# Altium PCB Pico_Stringer_PCB.PcbDoc
Units mm, origin at the board's own origin, x right, y up, seen from the top; angles counter-clockwise.
Board outline 187.9 x 69.4 mm, 2 copper layers (Top Layer, Bottom Layer); 43 components, 42 nets, 172 pads, 24 vias.
Unrouted connection lines stored in the file: 3.
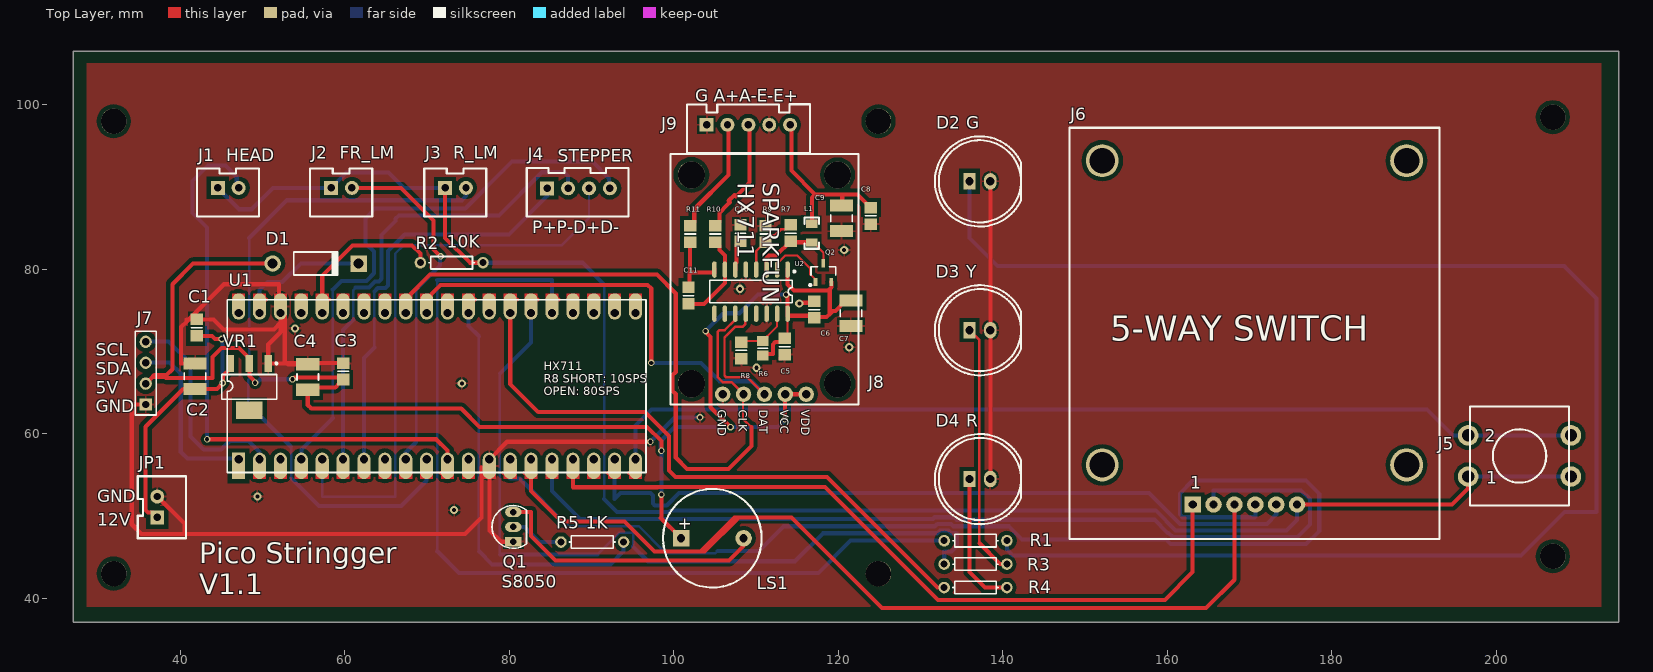
[diagram p0: Top Layer view]
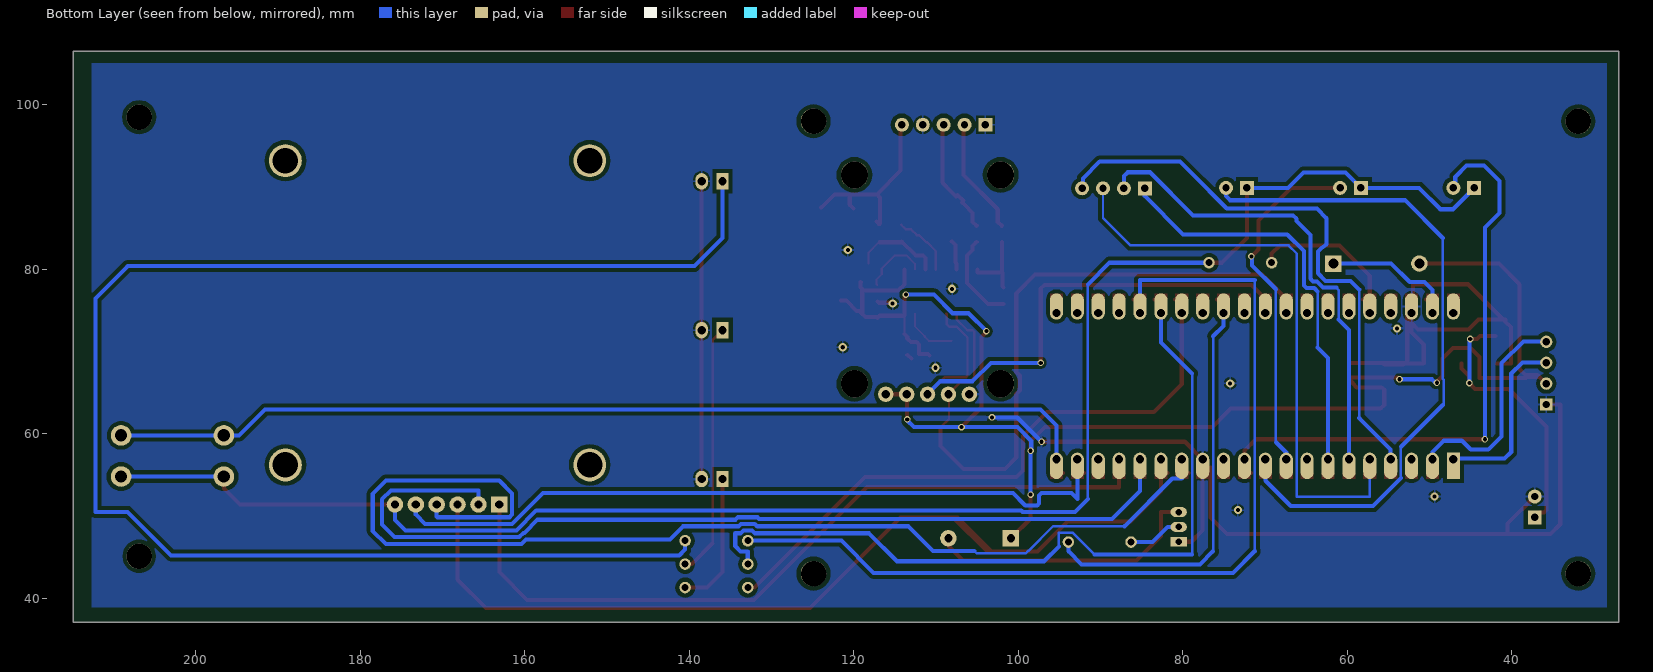
[diagram p1: Bottom Layer view, seen from below]

## Layer stack, top to bottom
Top Solder: solder mask 0.0102, Solder Resist, Dk 3.5
Top Layer: signal copper 0.0356
Dielectric 1: dielectric 0.32, FR-4, Dk 4.8
Bottom Layer: signal copper 0.0356
Bottom Solder: solder mask 0.0102, Solder Resist, Dk 3.5

## Board outline
27,37.1 27,106.5 214.9,106.5 214.9,37.1

## Design rules (kind name [scope] priority, off if disabled: settings)
Clearance [All] p1: gap=0.3 ignorepadtopadclearanceinfootprint=FALSE except(0.5: Arc-Fill Arc-Poly Arc-Region Track-Fill Track-Poly Track-Region SMDPad-Fill SMDPad-Poly SMDPad-Region THPad-Fill THPad-Poly THPad-Region)
PolygonConnect [All] p1: connectstyle=Relief reliefconductorwidth=0.254 reliefentries=4 polygonreliefangle="90 Angle" airgapwidth=0.254
RoutingTopology [All] p1: topology=Daisy_Simple
RoutingVias [All] p1: holewidth=0.5 width=0.8 viastyle="Through Hole" minholewidth=0.5 minwidth=0.8 maxholewidth=0.5 maxwidth=0.8
SMDNeckDown [All] p1: percent=50.000
SolderMaskExpansion [All] p1: expansion=0.102
Width [All] p1: maxlimit=1 minlimit=0.25 preferedwidth=0.3 minimp=50.000000 maximp=50.000000 favimp=50.000000
29 further rules are at their usual default settings.

## Components (designator, comment, footprint, x,y, rotation, side; value= is the part's Value field where it differs from the comment)
C1 "104" 6-0805_M 42,72.9 r270 top
C2 "10uF" C1210_M 41.8,67 r270 top
C3 "104" 6-0805_M 59.8,67.6 r270 top
C4 "10uF" C1210_M 55.5,66.9 r270 top
C5 "104" 6-0805_M 113.5,70.6 r90 top
C6 "104" 6-0805_M 117.1,75.1 r270 top
C7 "10uF" C1210_M 121.55,74.65 r90 top
C8 "104" 6-0805_M 123.975,86.5 r90 top
C9 "10uF" C1210_M 120.4,86.2 r90 top
C10 "104" 6-0805_M 108.114,84.4 r90 top
C11 "104" 6-0805_M 101.8,76.8 r270 top
D1 "IN5819" DO-41 56.46,80.7 r0 top
D2 "LED_G" "10mm LED" 135.96,90.7 r0 top
D3 "LED_Y" "10mm LED" 135.96,72.6 r0 top
D4 "LED_R" "10mm LED" 135.96,54.5 r0 top
J1 "Botton head" XH2.54-LI-2P 45.83,89.9 r0 top
J2 "Front Limit" XH2.54-LI-2P 59.605,89.9 r0 top
J3 "Rear Limit" XH2.54-LI-2P 73.47,89.9 r0 top
J4 "STEPPER" XH2.54-LI-4P 88.43,89.849 r0 top
J5 "Exit Botton" "12x12mm SWITCH" 196.6,54.8 r0 top
J6 "5-way switch" 5WAY_SWITCH 148.114,47.209 r0 top
J7 "2004 LCD" HDR1X4 35.8,63.56 r90 top
J8 "HX711" SPARKFUN_HX711 99.605,94.015 r270 top
J9 "HDR-1X5" XH2.54-LI-5P 109.075,97.575 r0 top
JP1 "HDR-1X2" XH2.54-LI-2P 37.2,51.1 r90 top
L1 "10uH" "L 0805" 116.8,84.4 r270 top
LS1 "Buzzer" Buzzer 104.7,47.3 r0 top
Q1 "SS8050" TO92A 80.5,48.673 r0 top
Q2 "MMBT4403" SOT23-3L 118.2,79.6 r0 top
R1 "150" AXIAL-0.3 136.7,47 r0 top
R2 "10K" AXIAL-0.3 73,80.8 r0 top
R3 "150" AXIAL-0.3 136.7,44.15 r0 top
R4 "150" AXIAL-0.3 136.7,41.3 r0 top
R5 "1K" AXIAL-0.3 90.1,46.835 r180 top
R6 "10K" 6-0805_N 110.8,70.4 r270 top
R7 "20K" 6-0805_M 114.227,84.4 r270 top
R8 "0K" 6-0805_M 108.225,70.15 r90 top
R9 "8.2K" 6-0805_M 111.17,84.3 r270 top
R10 "100" 6-0805_M 105.057,84.3 r270 top
R11 "100" 6-0805_M 102,84.3 r270 top
U1 "Pi Pico" PICO 45.6,52.35 r90 top
U2 "HX711" SOP16 109.4,77.3 r270 top
VR1 "AMS1117-5.0" AMS1117 61.6,72.5 r180 top

## Footprints (in the part's own frame and the unit in brackets; to place one, negate y for a bottom-side part, rotate by r counter-clockwise, add the part's x,y. Pads: shape width x height; smd on the part's side, far side on the other; paste and mask are expansions set on the pad)
5WAY_SWITCH [mm]
  rect 2x2 hole 1: 1(14.986,4.191)
  round 2 hole 1: 2(17.526,4.191) 3(20.066,4.191) 4(22.606,4.191) 5(25.146,4.191) 6(27.686,4.191)
  round 4 hole 3.1 unplated: ¢¯(4,9) ¢¯(4,46) ¢¯(41,9) ¢¯(41,46)
  silkscreen extent 0,0 45,50
6-0805_M [mm] "Chip Resistor, Body 2.0x1.2mm, IPC Low Density"
  rect 1.4x1.5 smd: 1(-1,0) 2(1,0)
  silkscreen extent 0,-0.65 0,0.65, body extent -1.07,-0.7 1.07,0.7, height 0.7
6-0805_N [mm] "Chip Resistor, Body 2.0x1.2mm, IPC Medium Density"
  rect 1.2x1.4 smd: 1(-0.9,0) 2(0.9,0)
  silkscreen extent 0,-0.6 0,0.6, body extent -1.07,-0.7 1.07,0.7, height 0.7
"10mm LED" [mm]
  rect 1.5x2 hole 1: 1(0,0)
  oval 1.5x2 hole 1: 2(2.54,0)
  silkscreen extent -4.2,-5.5 6.27,5.47
"12x12mm SWITCH" [mm]
  round 2.5 hole 1.5: 1(0,0) 1(12.5,0) 2(0,5) 2(12.5,5)
  silkscreen extent 0.25,-3.5 12.25,8.5
AMS1117 [mm]
  rect 0.9x2.1 smd: 1(15.5,3.95) 2(10.9,3.95) 3(13.2,3.95)
  rect 3.2x2.1 smd: 4(13.2,9.65)
  silkscreen extent 9.77,3.83 16.55,8.3, body extent 9.85,4.95 16.55,8.65, height 1.7
AXIAL-0.3 [mm] "Axial Device, Thru-Hole; 2 Leads; 0.3 in Pin Spacing"
  round 1.4 hole 0.85: 1(-3.81,0) 2(3.81,0)
  silkscreen extent -2.77,-0.76 2.77,0.76
Buzzer [mm]
  rect 2x2 hole 1: 1(-3.8,0)
  round 2 hole 1: 2(3.8,0)
  silkscreen extent -6,-6 6,6
C1210_M [mm] "Chip Capacitor, Body 3.2x2.5mm, IPC Low Density"
  rect 1.5x2.8 smd: 1(-1.55,0) 2(1.55,0)
  silkscreen extent -0.4,-1.3 0.4,1.3, body extent -1.7,-1.35 1.7,1.35, height 1.5
DO-41 [mm] "Diode, Axial; Body 5.2 x 2.7 mm (LxDia. max), Lead Dia. 0.86 mm (max)"
  round 2 hole 1.2: 1(-5.23,0)
  rect 2x2 hole 1.2: 2(5.23,0)
  silkscreen extent -2.65,-1.4 2.75,1.4
HDR1X4 [mm] "Connector; Header; 4 Position"
  rect 1.5x1.5 hole 0.9: 1(0,0)
  round 1.5 hole 0.9: 2(2.54,0) 3(5.08,0) 4(7.62,0)
  silkscreen extent -1.27,-1.27 8.89,1.27
"L 0805" [mil] "小功率贴片电感        淘宝ID:黄晶宝石"
  rect 40x55 smd: 1(-45,0) 2(45,0)
  silkscreen extent -75,-35 75,35, body extent -39,-24 39,24, height 35
PICO [mm]
  rect 3.2x1.6 hole 1 copper offset -0.8,0: 1(4.55,-1.5)
  oval 3.2x1.6 hole 1 copper offset -0.8,0: 2(4.55,-4.04) 3(4.55,-6.58) 4(4.55,-9.12) 5(4.55,-11.66) 6(4.55,-14.2) 7(4.55,-16.74) 8(4.55,-19.28) 9(4.55,-21.82) 10(4.55,-24.36) 11(4.55,-26.9) 12(4.55,-29.44) 13(4.55,-31.98) 14(4.55,-34.52) 15(4.55,-37.06) 16(4.55,-39.6) 17(4.55,-42.14) 18(4.55,-44.68) 19(4.55,-47.22) 20(4.55,-49.76)
  oval 3.2x1.6 hole 1 copper offset 0.8,0: 21(22.33,-49.76) 22(22.33,-47.22) 23(22.33,-44.68) 24(22.33,-42.14) 25(22.33,-39.6) 26(22.33,-37.06) 27(22.33,-34.52) 28(22.33,-31.98) 29(22.33,-29.44) 30(22.33,-26.9) 31(22.33,-24.36) 32(22.33,-21.82) 33(22.33,-19.28) 34(22.33,-16.74) 35(22.33,-14.2) 36(22.33,-11.66) 37(22.33,-9.12) 38(22.33,-6.58) 39(22.33,-4.04) 40(22.33,-1.5)
  Top Layer region: 23.98,-2.3 24.73,-2.3 24.73,-0.7 23.98,-0.7
  Top Layer region: 23.98,-4.84 24.73,-4.84 24.73,-3.24 23.98,-3.24
  Top Layer region: 23.98,-7.38 24.73,-7.38 24.73,-5.78 23.98,-5.78
  Top Layer region: 23.98,-9.92 24.73,-9.92 24.73,-8.32 23.98,-8.32
  Top Layer region: 23.98,-12.46 24.73,-12.46 24.73,-10.86 23.98,-10.86
  Top Layer region: 23.98,-15 24.73,-15 24.73,-13.4 23.98,-13.4
  Top Layer region: 23.98,-17.54 24.73,-17.54 24.73,-15.94 23.98,-15.94
  Top Layer region: 23.98,-20.08 24.73,-20.08 24.73,-18.48 23.98,-18.48
  Top Layer region: 23.98,-22.62 24.73,-22.62 24.73,-21.02 23.98,-21.02
  Top Layer region: 23.98,-25.16 24.73,-25.16 24.73,-23.56 23.98,-23.56
  Top Layer region: 23.98,-27.7 24.73,-27.7 24.73,-26.1 23.98,-26.1
  Top Layer region: 23.98,-30.24 24.73,-30.24 24.73,-28.64 23.98,-28.64
  Top Layer region: 23.98,-32.78 24.73,-32.78 24.73,-31.18 23.98,-31.18
  Top Layer region: 23.98,-35.32 24.73,-35.32 24.73,-33.72 23.98,-33.72
  Top Layer region: 23.98,-37.86 24.73,-37.86 24.73,-36.26 23.98,-36.26
  Top Layer region: 23.98,-40.4 24.73,-40.4 24.73,-38.8 23.98,-38.8
  Top Layer region: 23.98,-42.94 24.73,-42.94 24.73,-41.34 23.98,-41.34
  Top Layer region: 23.98,-45.48 24.73,-45.48 24.73,-43.88 23.98,-43.88
  Top Layer region: 23.98,-48.02 24.73,-48.02 24.73,-46.42 23.98,-46.42
  Top Layer region: 23.98,-50.56 24.73,-50.56 24.73,-48.96 23.98,-48.96
  Top Layer region: 2.9,-48.96 2.15,-48.96 2.15,-50.56 2.9,-50.56
  Top Layer region: 2.9,-46.42 2.15,-46.42 2.15,-48.02 2.9,-48.02
  Top Layer region: 2.9,-43.88 2.15,-43.88 2.15,-45.48 2.9,-45.48
  Top Layer region: 2.9,-41.34 2.15,-41.34 2.15,-42.94 2.9,-42.94
  Top Layer region: 2.9,-38.8 2.15,-38.8 2.15,-40.4 2.9,-40.4
  Top Layer region: 2.9,-36.26 2.15,-36.26 2.15,-37.86 2.9,-37.86
  Top Layer region: 2.9,-33.72 2.15,-33.72 2.15,-35.32 2.9,-35.32
  Top Layer region: 2.9,-31.18 2.15,-31.18 2.15,-32.78 2.9,-32.78
  Top Layer region: 2.9,-28.64 2.15,-28.64 2.15,-30.24 2.9,-30.24
  Top Layer region: 2.9,-26.1 2.15,-26.1 2.15,-27.7 2.9,-27.7
  Top Layer region: 2.9,-23.56 2.15,-23.56 2.15,-25.16 2.9,-25.16
  Top Layer region: 2.9,-21.02 2.15,-21.02 2.15,-22.62 2.9,-22.62
  Top Layer region: 2.9,-18.48 2.15,-18.48 2.15,-20.08 2.9,-20.08
  Top Layer region: 2.9,-15.94 2.15,-15.94 2.15,-17.54 2.9,-17.54
  Top Layer region: 2.9,-13.4 2.15,-13.4 2.15,-15 2.9,-15
  Top Layer region: 2.9,-10.86 2.15,-10.86 2.15,-12.46 2.9,-12.46
  Top Layer region: 2.9,-8.32 2.15,-8.32 2.15,-9.92 2.9,-9.92
  Top Layer region: 2.9,-5.78 2.15,-5.78 2.15,-7.38 2.9,-7.38
  Top Layer region: 2.9,-3.24 2.15,-3.24 2.15,-4.84 2.9,-4.84
  silkscreen extent 2.94,-51.03 23.94,-0.13
SOP16 [mm] "封装库来自淘宝卖家 ID：黄晶宝石"
  oval 2x0.55 smd: 1(-2.667,4.445) 2(-2.667,3.175) 3(-2.667,1.905) 4(-2.667,0.635) 5(-2.667,-0.635) 6(-2.667,-1.905) 7(-2.667,-3.175) 8(-2.667,-4.445) 9(2.692,-4.445) 10(2.692,-3.175) 11(2.692,-1.905) 12(2.692,-0.635) 13(2.692,0.635) 14(2.692,1.905) 15(2.692,3.175) 16(2.692,4.445)
  silkscreen extent -2.55,-5 1.37,5.4, body extent -2.92,-4.99 2.98,4.99, height 1.45
SOT23-3L [mm] "3x1.3x1mm(长宽高)    封装库来自淘宝卖家 ID：黄晶宝石"
  rect 0.45x1 smd: 1(-0.95,-1.143) 2(0.95,-1.143) 3(0,1.125)
  silkscreen extent -1.72,-1.65 1.5,0.7, body extent -1.5,-1.2 1.5,1.2, height 1.05
SPARKFUN_HX711 [mil]
  round 130 hole 130 unplated: 0(100,800) 0(100,100) 0(1100,800) 0(1100,100)
  round 74 / inner round 60 / far side round 74 hole 40: 1(1150,650) 2(1150,550) 3(1150,450) 4(1150,350) 5(1150,250)
  silkscreen extent 0,0 1200,900
TO92A [mm] "92晶体管  封装库来自淘宝卖家 ID：黄晶宝石"
  rect 2x1.2 hole 0.8: 1(0,-1.8)
  oval 2x1.2 hole 0.8: 2(0,0) 3(0,1.8)
  silkscreen extent -2.6,-2.6 1.6,2.6, body extent -2.3,-2.3 1.3,2.3, height 7.6
XH2.54-LI-2P [mm] "接插件，2P  淘宝ID:黄晶宝石   店铺网址:https://shop463601444.taobao.com"
  rect 1.7x1.7 hole 0.9: 1(-1.27,0)
  round 1.7 hole 0.9: 2(1.27,0)
  silkscreen extent -3.81,-3.51 3.74,2.37, body extent -3.77,-3.3 3.77,2.4, height 7.05
XH2.54-LI-4P [mm] "接插件，4P  淘宝ID:黄晶宝石   店铺网址:https://shop463601444.taobao.com"
  rect 1.7x1.7 hole 0.9: 1(-3.81,0)
  round 1.7 hole 0.9: 2(-1.27,0) 3(1.27,0) 4(3.81,0)
  silkscreen extent -6.3,-3.45 6.07,2.49, body extent -6.31,-3.3 6.31,2.4, height 7.03
XH2.54-LI-5P [mm] "接插件，5P  淘宝ID:黄晶宝石   店铺网址:https://shop463601444.taobao.com"
  rect 1.7x1.7 hole 0.9: 1(-5.08,0)
  round 1.7 hole 0.9: 2(-2.54,0) 3(0,0) 4(2.54,0) 5(5.08,0)
  silkscreen extent -7.48,-3.45 7.52,2.49, body extent -7.58,-3.3 7.58,2.4, height 7.03

## Part data
C1 C2 C3 C4 C5 C6 C7 C8 C9 C10 C11: library part C, "?片?容", BOM¦W?=?Ìå©Ê?¤, °ß¤@¥X°â©±?ÊI§}=https://shop463601444.taob, 瞊?ID="«Ê???¦Û²^? ID¡G", ?¨t°â¦Z¡A§Þ?¤ä«ù=https://shop463601444.taob
D1: library part "D Schottky", "Schottky Diode", Code_JEDEC=DO-214-AA, LatestRevisionDate=17-Jul-2002, LatestRevisionNote="Re-released for DXP Platform.", PackageDescription="DO-214-AA/SMB; 2 C-Bend Leads; Body 5.3 x 3.6 mm, inc. leads (LxW)", PackageReference=SMB, Published=8-Jun-2000, Publisher="Altium Limited"
D2 D3 D4: library part LED2, "Typical RED, GREEN, YELLOW, AMBER GaAs LED", LatestRevisionDate=17-Jul-2002, LatestRevisionNote="Re-released for DXP Platform.", PackageDescription="SM LED; 2 Flat Leads", PackageReference=3.2X1.6X1.1, PackageVersion=Feb-2002, Published=8-Jun-2000, Publisher="Altium Limited"
J1 J2 J3 J5: library part "Header 2", "2P钡础ン"
  J5: BOM¦W?=2P±µ´, ª©???="«Ê???¦Û²^? ID¡G", ?¨t°â¦Z=https://shop463601444.taobao.c
J4: library part "Header 4", "DIR PUL", LatestRevisionDate=17-Jul-2002, LatestRevisionNote="Re-released for DXP Platform.", Publisher="Altium Limited"
J6: library part "Header 6", "6P钡础ン", BOM¦W?=6P±µ´, ???方=https://shop463601444.taobao.com, ª©???="«Ê???¦Û²^? ID¡G"
J7: library part "Header 4", "2004 I2C LCD", LatestRevisionDate=17-Jul-2002, LatestRevisionNote="Re-released for DXP Platform.", Publisher="Altium Limited"
J8: library part "Header 5", "SPARKFUN_HX711", LatestRevisionDate=17-Jul-2002, LatestRevisionNote="Re-released for DXP Platform.", Publisher="Altium Limited"
J9: library part "Header 5", "Keyes Hx711 module"
JP1: library part "Header 2", "5V"
L1: library part L, "小功率?片?感"
LS1: "Magnetic Transducer Buzzer", ComponentLink1Description="Manufacturer Link", ComponentLink1URL=http://www.megastar.com/linecard/buzzmode/index.php, DatasheetVersion=17-Dec-2003, LatestRevisionDate=17-Dec-2003, LatestRevisionNote="Schematic revised, PCB Footprint replaced.", PackageDescription="Magnetic Transducer Buzzer", PackageReference=ABSM-1574, Published=24-Mar-1999, Publisher="Altium Limited"
Q1: library part 8050-DIP, "高?放大-NPN型"
Q2: library part 8550-SMD, "高?放大-PNP型"
R1 R2 R3 R4 R5: library part Res1, "Resistor", LatestRevisionDate=17-Jul-2002, LatestRevisionNote="Re-released for DXP Platform.", PackageDescription="Axial Device, Thru-Hole; 2 Leads; 0.3 in Pin Spacing", PackageReference=AXIAL-0.3, Published=8-Jun-2000, Publisher="Altium Limited"
R6 R7 R8 R9 R10 R11: library part R, "?¤ù?ªý", BOM¦W?=?¤ù?, «Ê???¦Û²^??®a ID¡G?´¹?¥Û=¨ä¥L©±??¤J§¡??ª©¡, ª©???="?¦Û²^? ID¡G?", ?¨t°â¦Z=https://shop463601444.taobao.c
VR1: library part "Volt Reg", "Voltage Regulator", LatestRevisionDate=29-May-2009, LatestRevisionNote="IPC-7351 Footprint Added.", PackageDescription="3-Pin Transistor Outline Package 2.54 mm Pitch, 15.1 mm Lead Span", PackageReference=D2PAK, Published=24-Mar-1999, Publisher="Altium Limited"

## Free pads (board coordinates)
  round 3.1 hole 3.1 unplated mask+0: 0(31.9,43) 0(31.9,98) 0(124.9,43) 0(124.9,98) 0(206.9,45.1) 0(206.9,98.5)

## Via types
v1: diameter 0.8, hole 0.5, Top Layer to Bottom Layer, tented both sides, 15 vias
v2: diameter 1, hole 0.5, Top Layer to Bottom Layer, tented both sides, 9 vias

## Nets (pads, with @x,y where several pads share a name; then routed paths per layer and width w, separated by ;. In a path a pad name is that pad's centre, name@x,y a point inside that pad or via, vN(x,y) a via of type N, cw(c..) or ccw(c..) an arc to the next point about the centre after c; other vN are vias at no path point)
3.3V_PULLUP: J1.1 J2.1 J3.1 J5.1 J6.6 R2.2 | length 209.1
  Top Layer w0.5: J3.1 72.2,83.82 75.22,80.8 R2.2 ; J6.6 194.66,51.4 196.6,53.34 J5.1@196.6,54.8
  Bottom Layer w0.3: 91.542,52.07 91.542,78.158
  Bottom Layer w0.5: J1.1 47.16,87.3 48.687,87.3 51.287,89.9 53.365,89.9 J2.1 60.2,91.765 65.318,91.765 67.183,89.9 J3.1 ; R2.2 88.9,80.8 91.542,78.158 ; 91.542,52.07 93.112,50.5 99.488,50.5 99.638,50.65 158.619,50.65 161.019,48.25 174.52,48.25 175.8,49.53 J6.6 ; J5.1@196.6,54.8 J5.1@209.1,54.8
+5: C3.2 C4.2 C5.2 C6.2 C7.2 D1.1 J7.2 J8.1 J8.2 LS1.1 Q2.2 R6.2 U2.1 U2.16 VR1.3 | length 199
  Top Layer w0.275: C5.2@113.845,72.125 113.845,74.377 U2.16
  Top Layer w0.5: J7.2 36.629,66.929 36.832,66.929 ; 43.18,80.696 43.18,80.7 ; v1(49.1,66.2) 49.1,66.343 48.4,67.043 VR1.3 48.4,69.15 47.141,70.409 45.009,70.409 43.942,69.342 43.942,66.8 38.254,66.8 38.125,66.929 36.832,66.929 ; D1.1 43.18,80.7 ; v1(53.645,66.624) 53.871,66.85 59.55,66.85 C3.2 59.75,66.6 59.3,66.15 59.3,66.1 58.85,65.65 55.8,65.65 C4.2 55.5,63.499 55.931,63.068 74.168,63.068 76.403,60.833 96.767,60.833 98.5,59.1 v1(98.5,57.939) ; v1(98.5,52.6) 98.5,49.85 98.425,49.775 LS1.1 ; v1(103.875,72.475) 103.875,72.394 104.48,71.789 104.48,63.222 v1(106.902,60.8) ; R6.2 110.993,69.693 112.05,69.693 112.05,70.857 112.343,71.15 113.05,71.15 C5.2 113.5,71.78 C5.2@113.845,72.125 ; v1(113.5,61.75) 113.545,61.795 113.545,64.78 J8.2@113.59,64.825 ; J8.2 J8.1 ; v1(113.675,76.925) 113.675,76.844 113.845,76.674 U2.16 ; U2.16@113.845,74.377 113.868,74.354 116.846,74.354 C6.2 117.2,74.2 118.6,74.2 118.979,74.579 ; U2.1 113.845,78.169 114.607,77.407 118.764,77.407 118.979,77.621 ; Q2.2 119.175,78.432 119.175,77.818 118.979,77.621 ; C7.2 120.9,76.2 119.65,74.95 119.35,74.95 118.979,74.579 ; 36.832,66.929 36.832,67.132 38.329,67.132 39.04,67.843 39.04,78.181 41.559,80.7 43.18,80.7 ; 118.979,74.579 118.979,77.621
  Bottom Layer w0.5: v1(49.1,66.2) 49.258,66.2 49.682,66.624 v1(53.645,66.624) ; v1(98.5,52.6) v1(98.5,57.939) 98.425,58.014 98.425,59.131 100.094,60.8 v1(106.902,60.8) 112.7,60.8 113.5,61.6 v1(113.5,61.75) ; v1(103.875,72.475) 106.054,74.654 107.979,74.654 110.25,76.925 v1(113.675,76.925)
+12: C1.2 C2.2 JP1.1 VR1.1 | length 34.9
  Top Layer w0.5: JP1.1 36.6,50.43 36.063,50.43 35.77,50.723 35.77,60.856 40.364,65.45 C2.2 44.45,65.45 45.207,66.207 45.207,67.057 46.1,67.95 VR1.1 ; C1.2 43.864,71.9 44.239,71.525 v1(45.05,71.525) v1@45.05,71.575
  Bottom Layer w0.5: v1(45.05,71.525) 45.15,71.425 v1(45.15,66.175)
A+: J9.2 R11.1 | length 14.3
  Top Layer w0.5: R11.1 102.05,85.3 102.5,85.75 102.5,87.3 106.68,91.48 J9.2@106.68,97.625
A-: J9.3 R10.1 | length 14.4
  Top Layer w0.5: R10.1 105.107,85.3 105.557,85.75 105.557,86.862 106.5,87.805 106.854,88.159 106.677,88.335 107.384,89.042 107.561,88.866 108.047,89.353 109.22,90.525 J9.3@109.22,97.475
BUZ: R5.1 U1.29 | length 52
  Top Layer w0.5: U1.29 75.04,76.33 75.84,76.33
  Bottom Layer w0.3: 76.302,45.72 76.302,71.857
  Bottom Layer w0.5: U1.29 75.04,73.118 76.302,71.857 ; 76.302,45.72 77.902,44.12 92.31,44.12 93.91,45.72 R5.1
DAT: J8.3 U1.31 U2.12 | length 69.8
  Top Layer w0.3: U2.12 108.717,74.56 108.717,73.363 108.36,73.006 107.467,73.006 106.461,72 106.451,72 106.175,71.724 106.175,67.066 106.351,66.89 108.935,66.89 J8.3@111.175,64.65
  Top Layer w0.5: U1.31 69.96,76.401 71.659,78.1 96.825,78.1 97.275,77.65 v1(97.275,68.625)
  Bottom Layer w0.5: v1(97.275,68.625) 103.332,68.625 105.567,66.39 109.485,66.39 J8.3@111.05,64.825 ; J8.3@110.662,64.805 J8.3
DIR+: J4.3 U1.5 | length 73.6
  Top Layer w0.3: U1.5@57.26,55.25 U1.5
  Bottom Layer w0.3: U1.5 57.26,52.37 66.142,52.37 66.142,81.915 67.132,82.906 86.36,82.906 89.7,86.246 J4.3
DIR-: J4.4 U1.4 | length 71.1
  Top Layer w0.5: U1.4@54.72,55.626 U1.4
  Bottom Layer w0.3: 58.547,61.9 58.547,77.547
  Bottom Layer w0.5: U1.4 54.72,58.073 58.547,61.9 ; 58.547,77.547 59.6,78.6 62.629,78.6 63.55,79.521 63.55,82.165 63.14,82.575 62.5,83.04 62.5,86.2 63.7,87.4 74.649,87.4 78.998,91.749 80.349,93.1 90.1,93.1 92.152,91.048 92.152,89.937 J4.4
E+: C8.2 C9.2 J9.5 L1.1 | length 23
  Top Layer w0.5: J9.5@114.3,97.525 114.3,92 117.2,89.1 ; L1.1 116.8,88.7 117.2,89.1 ; L1.1@116.991,85.543 L1.1@117.25,85.803 ; C9.2@120.05,87.4 C9.2 120.5,87.85 120.5,89.1 ; C8.2 123.925,87.5 122.325,89.1 120.5,89.1 ; 117.2,89.1 120.5,89.1
FRONT_LM: J2.2 U1.9 | length 43.7
  Top Layer w0.5: J2.2 66.818,89.9 70.8,85.918 70.8,82.425 v1(71.65,81.575) 70.975,82.25
  Bottom Layer w0.3: 68.682,58.97 68.682,77.572
  Bottom Layer w0.5: U1.9 67.42,57.709 68.682,58.97 ; 68.682,77.572 71.593,80.483 71.593,81.518 v1(71.65,81.575)
G: R1.1 U1.25 | length 117.8
  Top Layer w0.5: U1.25 85.2,76.33 86,76.33
  Bottom Layer w0.3: 71.247,45.72 71.247,78.7
  Bottom Layer w0.5: 71.247,45.72 73.889,43.078 117.583,43.078 121.504,47 R1.1 ; 71.247,78.7 85.2,78.7 U1.25
GND: C1.1 C2.1 C3.1 C4.1 C5.1 C6.1 C7.1 C8.1 C9.1 C10.2 D2.2 D3.2 D4.2 J7.1 J8.5 J9.1 J9.4 JP1.2 Q1.1 R8.1 R9.1 U1.13 U1.38 U2.5 U2.14 VR1.2 | length 216.2
  Top Layer w0.5: J7.1 34.1,63.56 34.1,49 35.272,47.828 40.5,47.828 ; JP1.2 40.5,49.07 40.5,47.828 ; C2.1 40.1,68.55 40.1,72.968 40.792,73.66 ; U1.38@52.705,76.705 U1.38@52.705,76.33 ; C4.1 53.135,68.45 53.035,68.55 VR1.2 50.7,70.866 52.18,72.346 52.18,73.497 ; C3.1 52.705,68.6 U1.38@52.705,76.33 ; 76.606,55.88 76.606,49.826 74.608,47.828 40.5,47.828 ; 76.78,55.25 U1.13@77.58,55.25 ; U1.13 U1.13@77.58,56.854 ; Q1.1 78.967,46.873 77.58,48.26 U1.13@77.58,55.25 ; v1(97.155,59.03) 79.756,59.03 U1.13@77.58,56.854 ; C5.1@113,69.15 113.45,69.6 C5.1 ; v2(115.275,75.831) 115.371,75.927 116.927,75.927 C6.1 ; D4.2 D3.2 D2.2 ; 40.792,73.66 40.792,73.9 41.032,73.9 ; 40.792,73.66 41.032,73.9 ; 41.032,73.9 45.314,78.181 52,78.181 52,75.38 U1.38@52.18,75.2 ; 41.032,73.9 C1.1 44.038,73.9 45.238,72.7 51.383,72.7 52.18,73.497 ; 52.18,73.497 U1.38 U1.38@52.18,75.2 ; U1.38@52.18,75.2 52.18,76.33 U1.38@52.705,76.33 ; U1.13@77.58,55.25 U1.13@77.58,56.854
  Bottom Layer w0.5: v1(97.155,59.03) 100.125,62 v1(103.2,62)
  other v2: 73.3,50.725 49.375,52.375 74.24,66.125 110.075,68.025 121.35,70.525 53.95,72.8 108.047,77.625 120.725,82.35
HEAD_BT: J1.2 U1.11 | length 73.6
  Top Layer w0.5: v1(43.256,59.334) 71.12,59.334 72.5,57.954 72.5,55.25 71.7,55.25
  Bottom Layer w0.5: v1(43.256,59.334) 43.256,85.09 41.5,86.846 41.5,90.749 43.351,92.6 45.5,92.6 46.87,91.23 46.87,90.13 J1.2
NetC10_1: C10.1 U2.6 | length 3.7
  Top Layer w0.5: U2.6 107.495,80.706 107.614,80.824 107.614,82.95 108.064,83.4 C10.1
NetC11_1: C11.1 R11.2 U2.8 | length 8.9
  Top Layer w0.5: C11.1 101.933,77.933 101.933,79.634 ; R11.2 102,79.7 101.933,79.634 ; U2.8 104.955,79.657 104.932,79.634 101.933,79.634
NetC11_2: C11.2 R10.2 U2.7 | length 11
  Top Layer w0.5: C11.2 103.7,75.8 106.225,78.325 U2.7 106.225,81.682 105.557,82.35 105.557,82.85 105.107,83.3 R10.2
NetD1_2: D1.2 U1.39 | length 19.7
  Top Layer w0.5: U1.39 49.64,76.33 50.44,76.33
  Bottom Layer w0.5: U1.39 49.64,77.47 50.605,78.435 52.4,78.435 54.665,80.7 D1.2 60.579,80.7
NetD2_1: D2.1 R1.2 | length 187.4
  Bottom Layer w0.5: D2.1 135.96,83.82 139.389,80.391 208.28,80.391 212.2,76.471 212.2,50.5 208.306,50.5 203.006,45.2 141.228,45.2 140.51,45.918 R1.2
NetD3_1: D3.1 R3.2 | length 30.8
  Top Layer w0.3: D3.1 137.16,71.4 137.16,46.69
  Top Layer w0.5: 137.16,46.69 139.7,44.15 R3.2
NetD4_1: D4.1 R4.2 | length 16.6
  Top Layer w0.5: D4.1 135.96,43.18 137.84,41.3 R4.2
NetL1_2: L1.2 Q2.3 R7.2 U2.3 | length 11.1
  Top Layer w0.25: L1.2@116.889,83.288 116.959,83.288 118.2,82.047 Q2.3
  Top Layer w0.5: U2.3 111.305,81.363 111.598,81.656 112.494,81.656 112.494,81.717 114.177,83.4 R7.2 114.339,83.288 L1.2@116.889,83.288
NetLS1_2: LS1.2 Q1.3 | length 33.8
  Top Layer w0.5: Q1.3 82.66,50.473 82.66,47.566 85.626,44.6 106.745,44.6 108.5,46.355 LS1.2
NetQ1_2: Q1.2 R5.2 | length 6.6
  Bottom Layer w0.5: Q1.2 81.832,48.673 83.67,46.835 R5.2
NetQ2_1: Q2.1 U2.2 | length 8.1
  Top Layer w0.25: U2.2 112.575,80.692 113.565,81.682 115.018,81.682 116.6,80.1 116.6,79.382 117.25,78.732 Q2.1 117.25,78.182 Q2.1@117.15,78.082
NetR2_1: R2.1 U1.36 | length 20.3
  Top Layer w0.5: U1.36 U1.36@57.26,76.33 ; 58.06,76.33 U1.36@57.26,76.33 ; R2.1 69.19,81.915 68.199,82.906 60.96,82.906 57.26,79.206 57.26,76.705 U1.36@57.26,76.33
NetR6_1: R6.1 R8.2 U2.15 | length 6.8
  Top Layer w0.25: R8.2@108.125,71.275 108.15,71.3 R6.1 110.9,71.3 111.375,71.775 111.375,71.875 112.575,73.075 U2.15
NetR7_1: R7.1 R9.2 U2.4 | length 7.8
  Top Layer w0.3: U2.4 110.035,82.215 111.12,83.3 R9.2 111.22,83.3 112.07,84.15 112.327,84.15 113.027,84.85 113.677,84.85 R7.1
PUL+: J4.1 U1.7 | length 50.1
  Bottom Layer w0.3: 63.602,70.485 63.602,77.31
  Bottom Layer w0.5: U1.7 62.34,69.223 63.602,70.485 ; 63.602,77.31 64.014,77.722 64.957,77.722 65.282,78.047 65.282,82.222 67.298,84.238 79.958,84.238 84.62,88.9 J4.1
PUL-: J4.2 U1.6 | length 58
  Bottom Layer w0.3: 61.062,73.88 61.062,77.462 61.325,77.725
  Bottom Layer w0.5: U1.6 59.8,72.619 61.062,73.88 ; 61.325,77.784 62.945,77.784 63.682,78.522 64.157,78.522 64.482,78.847 64.482,84.157 66.188,85.863 66.188,86.151 66.575,86.538 78.74,86.538 84.002,91.8 86.685,91.8 87.16,91.325 J4.2
R: R4.1 U1.27 | length 76.5
  Top Layer w0.5: 80.92,76.33 80.12,76.33 80.12,66.04 83.524,62.636 96.52,62.636 99.45,59.706 99.45,55.541 100.228,54.762 118.618,54.762 132.08,41.3 R4.1
REAR_LM: J3.2 U1.10 | length 82.7
  Bottom Layer w0.3: 48.387,63.5 48.25,63.637 48.25,66.552 48.387,66.689 48.387,83.82 ; 53.467,54.61 53.467,58.42
  Bottom Layer w0.5: 48.387,63.5 53.467,58.42 ; 48.387,83.82 52.967,88.4 74.24,88.4 74.74,88.9 J3.2 ; 53.467,54.61 56.877,51.2 66.872,51.2 69.96,54.288 U1.10
SCK: J8.4 U1.32 U2.11 | length 89.5
  Top Layer w0.3: U2.11 107.495,73.883 106.212,72.6 105.55,72.6 105.375,72.424 105.375,66.852 105.937,66.29 107.045,66.29 108.51,64.825 108.425,64.74 108.425,61.817 109.425,60.817 109.425,60.625
  Top Layer w0.5: U1.32@67.42,76.33 U1.32 67.42,76.412 70.358,79.35 97.95,79.35 100.25,77.05 100.25,67.513 99.819,67.082 99.819,65.258 100.25,64.827 100.25,57.118 101.638,55.73 106.68,55.73 109.442,58.492 109.442,60.8
SCL: J7.4 U1.2 | length 28.1
  Top Layer w0.5: U1.2@49.627,55.25 49.632,55.245 49.635,55.245 49.64,55.245 U1.2
  Bottom Layer w0.5: J7.4 35.8,71.22 38.584,71.22 41.224,68.58 41.224,59.69 42.85,58.064 44.983,58.064 46.076,59.157 48.26,59.157 49.64,57.777 U1.2
SDA: J7.3 U1.1 | length 21.8
  Bottom Layer w0.5: J7.3 35.8,68.68 38.686,68.68 40.056,67.31 40.056,57.785 40.869,56.972 47.1,56.972 U1.1
SW_D: J6.2 U1.16 | length 117.7
  Top Layer w0.5: U1.16@85.2,55.25 U1.16
  Bottom Layer w0.5: U1.16 85.2,53.05 88.6,49.65 131.509,49.65 131.71,49.85 134.071,49.85 134.371,49.55 158.45,49.55 160.05,47.95 160.187,47.95 160.687,47.45 175.83,47.45 177.35,48.97 177.35,52.042 176.292,53.1 165.64,53.1 J6.2
SW_EXIT: J5.2 U1.20 | length 122.4
  Top Layer w0.5: 94.56,55.25 95.36,55.25 U1.20
  Bottom Layer w0.5: U1.20 95.36,60.994 97.316,62.95 191.592,62.95 194.742,59.8 196.6,59.8 J5.2@209.1,59.8
SW_L: J6.3 U1.15 | length 126
  Top Layer w0.5: 81.86,55.25 81.88,55.24 81.882,55.24 U1.15@82.66,54.875 ; 97.666,45.666 103.251,45.666 103.766,45.666 107.909,49.809 ; J6.3 168.18,42.247 164.733,38.8 125.309,38.8 114.3,49.809 107.909,49.809 ; 82.66,53.027 U1.15@82.66,54.875 ; 82.66,53.027 U1.15@82.66,54.875 ; 82.66,53.027 86.36,49.327 94.005,49.327 97.663,45.669 103.251,45.669 107.391,49.809 107.909,49.809 ; U1.15@82.66,54.875 U1.15 U1.15@82.66,54.875
SW_R: J6.4 U1.14 | length 146.1
  Top Layer w0.5: 79.32,55.25 79.456,55.25 79.705,55.499 80.12,55.499 U1.14
  Bottom Layer w0.3: 87.089,48.75 95.775,48.75 98.775,45.75 98.806,45.75 99.081,45.475 105.081,45.475 105.356,45.75
  Bottom Layer w0.5: U1.14 80.12,54.559 81.28,54.559 87.089,48.75 ; 105.356,45.75 110.375,45.75 113.375,48.75 131.741,48.75 132.041,49.05 133.739,49.05 134.039,48.75 140.759,48.75 142.359,47.15 159.856,47.15 160.406,46.6 176.9,46.6 178.5,48.2 178.5,52.7 176.9,54.3 163.114,54.3 161.55,52.736 161.55,50.172 161.872,49.85 170.62,49.85 170.72,49.95 J6.4
SW_SET: J6.5 U1.19 | length 93.1
  Top Layer w0.5: 92.02,55.25 92.82,55.25 U1.19
  Bottom Layer w0.5: U1.19 92.82,52.07 93.55,52.8 97.182,52.8 97.475,52.507 97.475,51.525 97.7,51.3 99.157,51.3 100.657,52.8 157.791,52.8 161.541,49.05 172.145,49.05 173.26,50.165 J6.5
SW_U: J6.1 U1.17 | length 94.1
  Top Layer w0.5: U1.17 87.74,54.875 87.74,53.5 98.056,53.5 98.106,53.55 118.408,53.55 132.158,39.8 159.72,39.8 163.1,43.18 J6.1
Y: R3.1 U1.26 | length 99.1
  Top Layer w0.5: U1.26 82.66,76.33 83.46,76.33
  Bottom Layer w0.3: 78.867,45.3 78.867,67.327 ; 90.715,45.3 93.4,47.985 95.072,47.985 95.072,46.279
  Bottom Layer w0.5: 78.867,45.3 90.715,45.3 ; 78.867,67.327 82.66,71.12 U1.26 ; 95.072,46.279 96.851,44.5 114.765,44.5 118.165,47.9 132.022,47.9 132.372,48.25 133.408,48.25 133.758,47.9 134.417,47.9 134.417,46.355 133.756,45.695 132.89,45.695 R3.1
pads on no net: J6.¢¯ J8.0 U1.3 U1.8 U1.12 U1.18 U1.21 U1.22 U1.23 U1.24 U1.28 U1.30 U1.33 U1.34 U1.35 U1.37 U1.40 U2.9 U2.10 U2.13 VR1.4

## Polygon pours and split planes (outlines as drawn)
GND on Bottom Layer "GND_L02_P004" (solid, remove dead copper, pour order 4): 28.475,105.025 212.675,105.025 212.675,38.9 28.475,38.9
GND on Top Layer "GND_L01_P006" (solid, remove dead copper, pour order 6): 28.6,105.075 212.8,105.075 212.8,38.95 28.6,38.95

## Silkscreen, mask and mechanical layers (free items; w line width, h text height)
Top Overlay:
  text "G A+A-E-E+" at 102.6,100.4 h1.52
  text "G" at 135.6,97.067 h1.52
  text "FR_LM" at 59.4,93.418 h1.52
  text "R_LM" at 73.2,93.416 h1.52
  text "HEAD" at 45.6,93.164 h1.52
  text "STEPPER" at 85.9,93.1 h1.52
  text "P+P-D+D-" at 82.8,84.4 h1.52
  text "10K" at 72.4,82.6 h1.52
  text "Y" at 135.6,78.963 h1.52
  text "HX711 / R8 SHORT: 10SPS / OPEN: 80SPS" at 84.2,64.7 h1
  text "SCL / SDA / 5V / GND" at 29.7,62.6 h1.52
  text "R" at 135.6,60.871 h1.52
  text "GND" at 29.895,51.7 h1.52
  text "12V" at 29.895,48.8 h1.52
  text "1K" at 89.3,48.451 h1.52
  text "S8050" at 79.1,41.3 h1.52
  text "Pico Stringger  / V1.1" at 42.3,40.5 h2.5
Mechanical 1:
  the board outline again, w0.254

## Text inside footprints (layer, text, board x,y; h text height)
J5: Top Overlay "2" at 198.6,59 h1.52; Top Overlay "1" at 198.8,53.9 h1.52
J6: Top Overlay "1" at 162.814,53.309 h1.52; Top Overlay "5-WAY SWITCH" at 153.1,71.3 h3
J8: Top Overlay "SPARKFUN / HX711" at 107.805,90.515 h2 r270; Top Overlay "GND" at 105.345,62.915 h1 r270; Top Overlay "CLK" at 107.885,62.915 h1 r270; Top Overlay "DAT" at 110.425,62.915 h1 r270; Top Overlay "VCC" at 112.965,62.915 h1 r270; Top Overlay "VDD" at 115.505,62.915 h1 r270
LS1: Top Overlay "+" at 100.5,48.4 h1.52